# Allegro board PROIECT-PCB.brd
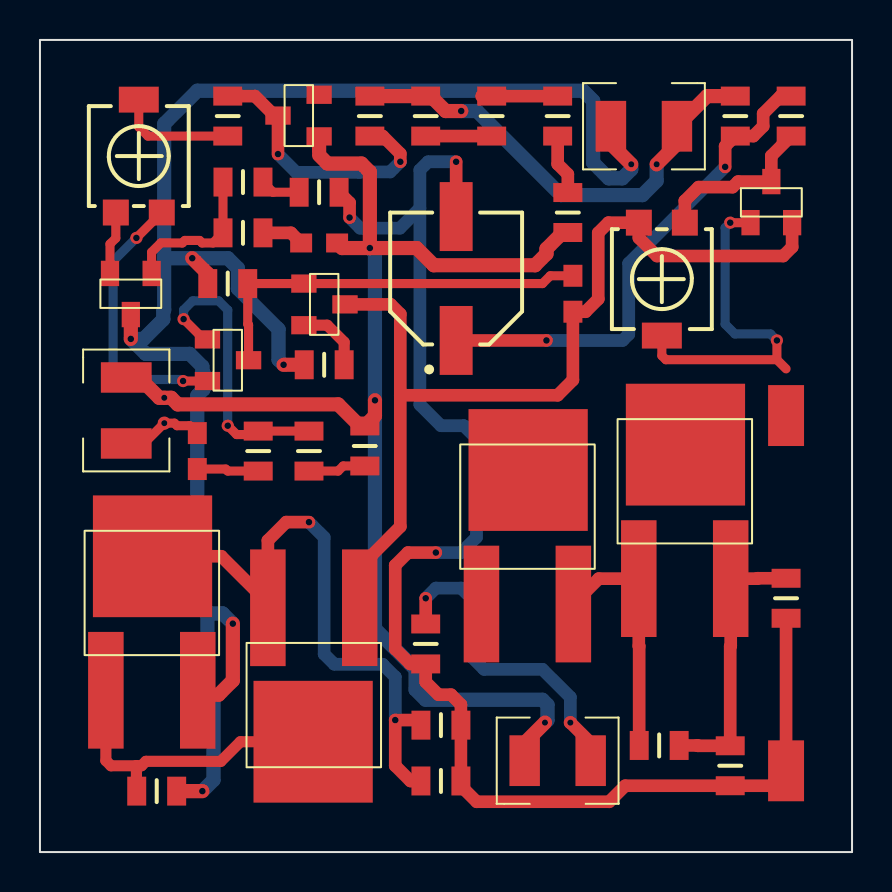
[diagram p0: board, top side]
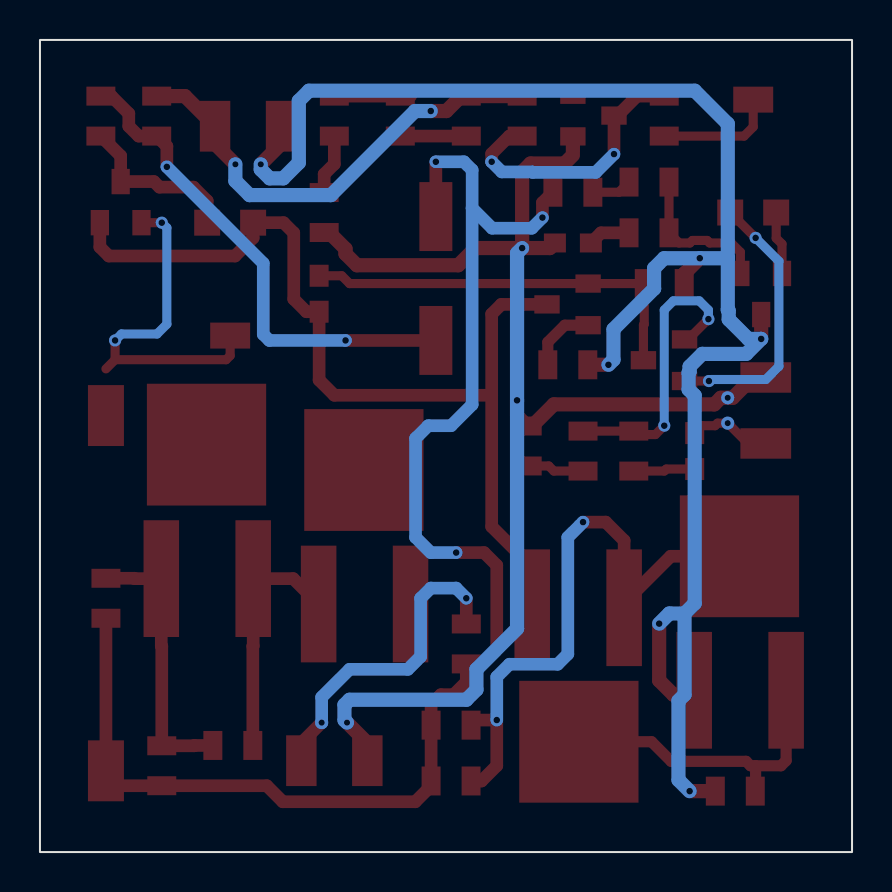
[diagram p1: board, bottom side, seen from below]

Outline 40.64 x 40.64 mm; copper layers: TOP, BOTTOM. Coordinates in mm from the lower left corner of the outline.
Outline path: rectangle 0,0 40.64,40.64

## Design rules (mm)
nets with their own width: min track width 0.457; nets N17839 N18413 N18419 N18433 N18443 N18567 N18575 N18713 N20372 N20376 SIGNAL-IN
nets with their own width: min track width 0.559; nets N18985 N19025
nets with their own width: min track width 0.635; nets N17849 N17953 N18017 N18083 N18151 N18611 N18637 N18835 N24736 N25913 N26075 N26146 SIGNAL-OUT
nets with their own width: min track width 0.711; nets +27V -27V GND

## Placement (name value [footprint] x y rotation side)
C1  4.7u  [CAPC2008X126N_0805]  7.87 20.07 270 top
C2  4.7u  [CAPC2008X126N_0805]  13.97 30.48 0 top
C3  10u  [CAPAE660X770N]  20.83 28.7 90 top
C4  4.7p  [CAPC2008X126N_0805]  26.67 27.94 270 top
D1  BZX84-C10  [TO236AB]  13.97 35.81 0 top
D2  LED  [RES2012X50N_0805]  26.42 32 270 top
J1  CON2  [1210RF_WV_12D]  4.32 22.1 90 top
J2  CON2  [1210RF_WV_12D]  30.23 36.32 0 top
J3  CON2  [1210RF_WV_12D]  25.91 4.57 180 top
J4  CON1  [SMD_PAD_3-05_1-80]  37.34 21.84 90 top
J5  CON1  [SMD_PAD_3-05_1-80]  37.34 4.06 270 top
Q1  QBC856B  [TO236AB]  8.38 25.65 180 top
Q2  QBC856B  [TO236AB]  5.59 28.96 90 top
Q3  QBC817-25  [TO236AB]  13.21 28.45 180 top
Q4  QBC846B  [TO236AB]  35.56 31.5 270 top
Q5  QMJD31C  [TO252AA]  22.1 12.45 0 top
Q6  QMJD32CT4G  [TO252AA]  16 12.19 180 top
Q7  QMJD31C  [TO252AA]  29.97 13.72 0 top
Q8  QMJD31C  [TO252AA]  3.3 8.13 0 top
R1  4.7  [RES2012X50N_0805]  10.92 20.07 90 top
R7  3.3k  [RES2012X50N_0805]  16.51 36.83 90 top
R8  15k  [RES2012X50N_0805]  9.4 36.83 90 top
R9  500  [TS53YL]  6.1 32 270 top
R10  3.3k  [RES2012X50N_0805]  10.16 30.99 0 top
R11  5.6k  [RES2012X50N_0805]  9.4 28.45 180 top
R12  330  [RES2012X50N_0805]  34.8 36.83 270 top
R13  3.3k  [RES2012X50N_0805]  37.59 36.83 270 top
R14  5k  [TS53YL]  29.97 31.5 90 top
R15  33  [RES2012X50N_0805]  14.22 24.38 180 top
R26  0.47  [RES2012X50N_0805]  30.99 5.33 0 top
R27  0.47  [RES2012X50N_0805]  5.84 3.05 0 top
R30  4.7  [RES2012X50N_0805]  19.3 10.41 90 top
R31  8.2k  [RES2012X50N_0805]  10.16 33.53 0 top
R32  22k  [RES2012X50N_0805]  13.97 33.02 0 top
R61  8.2k  [RES2012X50N_0805]  13.46 20.07 270 top
R62  22k  [RES2012X50N_0805]  16.26 20.32 90 top
R71  1k  [RES2012X50N_0805]  19.3 36.83 90 top
R72  220  [RES2012X50N_0805]  22.61 36.83 90 top
R73  33  [RES2012X50N_0805]  25.91 36.83 270 top
R281  1  [RES2012X50N_0805]  34.54 4.32 270 top
R282  0.47  [RES2012X50N_0805]  37.34 12.7 270 top
R291  1  [RES2012X50N_0805]  20.07 3.56 180 top
R292  0.47  [RES2012X50N_0805]  20.07 6.35 180 top

## Library data of the parts
C1 C2 C4 = CAP
C3 = CAPACITOR POL/SM_0
D1 = TCR22-2/TO_0
D2 = LED
J1-J3 = CON2
J4 J5 = CON1
Q1 = PNP BCE_0
Q2 = PNP BCE_1
Q3 = NPN BCE_0
Q4 = NPN BCE_1
Q5 Q7 Q8 = NPN BCE
Q6 = PNP BCE
R1 R7 R8 R10-R13 R15 R26 R27 R30-R32 R61 R62 R281 R282 R291 R292 = R
R9 R14 = POT
R71-R73 = RESISTOR

## Footprints (pads in the part's own frame, mm; a bottom-side part is the same pattern mirrored in y, then rotated)
1210RF_WV_12D
  rect 1.524x2.54 smd: 1(-1.651,0) 2(1.651,0)
CAPAE660X770N
  rect 3.45x1.65 smd: 1(-3.1,0) 2(3.1,0)
CAPC2008X126N_0805
  rect 1.1x0.95 smd: 1(-0.9,0) 2(0.9,0)
RES2012X50N_0805
  rect 0.95x1.45 smd: 1(-1,0) 2(1,0)
SMD_PAD_3-05_1-80
  rect 3.05x1.8 smd: 1(0,0)
TO236AB
  rect 1.27x0.914 smd: 1(0,0) 2(0,2.083) 3(-2.057,1.041)
TO252AA
  rect 1.778x5.842 smd: 1(-0.004,-0.034) 3(4.596,-0.034)
  rect 5.969x6.096 smd: 2(2.332,6.673)
TS53YL
  rect 1.3x1.3 smd: 1(0,0) 3(0,-2.3)
  rect 1.3x2 smd: 2(-5.65,-1.15)

## Nets
+27V: J2.2 Q5.2 Q7.2 R7.2 R12.1 R71.2
-27V: J2.1 Q2.3 Q8.3(E) R11.2 R15.2 R27.2
GND: C2.2 D1.1 D2.2(CATHODE) J1.2 J3.2 R62.2
SIGNAL-IN: C1.1 J1.1
SIGNAL-OUT: J3.1 R30.2
N17839: R8.1 R9.2(WIPER)
N17849: D1.3 R7.1 R8.2
N17953: Q4.3 Q5.1 R13.2 R14.3
N18017: Q5.3(E) Q7.1 R26.1
N18083: C3.1 R12.2 R13.1
N18151: Q7.3(E) R26.2 R281.1 R282.1
N18413: C1.2 R1.1
N18419: Q1.1 R1.2 R61.1
N18433: Q2.1 R10.1 R31.1
N18443: R31.2 R32.1
N18567: C4.1 Q1.3 Q3.1 R11.1
N18575: J4.1 Q4.1 R14.2(WIPER)
N18611: C4.2 Q3.3 Q4.2(E) Q6.1 R14.1
N18637: C3.2(CATHODE) J5.1 R30.1 R32.2 R281.2 R282.2 R291.1 R292.1
N18713: R61.2 R62.1
N18835: Q6.3(E) Q8.2 R291.2 R292.2
N18985: Q6.2 Q8.1 R27.1
N19025: Q3.2(E) R15.1
N20372: Q2.2(E) R9.3
N20376: Q1.2(E) R9.1
N24736: C2.1 R10.2
N25913: R72.2 R73.1
N26075: D2.1 R73.2
N26146: R71.1 R72.1

Pads without a net: D1 2

## Via types
v1: diameter 0.61, hole 0.33, TOP to BOTTOM, 24 vias
v2: diameter 0.66, hole 0.305, TOP to BOTTOM, 6 vias

## Routing (per net, layer and track width the routed paths; a pad name or vN(x,y) marks a point on that pad's centre or on a via; arc(x,y) is an arc through that point)
+27V: length 23.4
  TOP w0.711: v2(30.86,34.42) 31.88,35.43 J2.2 33.38,37.83 R12.1 ; R7.2 R71.2 19.55,37.83 20.3,37.08 v1(21.08,37.08)
  BOTTOM w0.711: v2(30.86,34.42) 30.86,33.59 30.15,32.88 26.08,32.88 21.87,37.08 v1(21.08,37.08)
-27V: length 89.6
  TOP w0.711: Q2.3 v1(4.55,25.68) ; v2(29.59,34.42) 28.57,35.43 J2.1 ; 8.38,28.43 R11.2 8.4,28.94 v1(7.62,29.72) ; R27.2 v1(8.13,3.05) ; v1(9.65,11.43) 9.65,8.59 8.94,7.87 7.93,7.87 7.9,7.84 ; v1(12.19,24.38) R15.2
  BOTTOM w0.711: 6.22,29.72 6.22,27.14 6.17,27.09 6.17,26.66 5.19,25.68 v1(4.55,25.68) 5.3,24.93 7.49,24.93 8.13,24.3 8.13,24.04 8.18,23.99 8.18,23.15 7.87,22.85 7.87,12.45 8.38,11.94 ; 6.22,29.72 6.22,36.44 7.87,38.1 27.18,38.1 27.69,37.59 27.69,34.49 28.46,33.72 29.14,33.72 29.59,34.16 v2(29.59,34.42) ; 6.22,29.72 v1(7.62,29.72) 9.4,29.72 9.91,29.21 9.91,28.19 11.94,26.16 11.94,24.64 v1(12.19,24.38) ; v1(9.65,11.43) 9.14,11.94 8.38,11.94 ; v1(8.13,3.05) 8.69,3.61 8.69,7.57 8.38,7.87 8.38,11.94
GND: length 68
  TOP w0.711: J1.2 4.95,23.75 5.97,22.73 v2(6.22,22.73) 6.56,22.73 6.89,22.4 14.92,22.4 16.01,21.32 R62.2 16.76,21.83 v1(16.76,22.61) ; C2.2 15.12,30.23 v1(16.51,30.23) ; J3.2 24.26,5.46 v2(25.27,6.48) ; D1.1 13.97,35.05 ; D2.2 26.17,31 25.35,30.19 25.35,29.94 24.78,29.37 19.71,29.37 18.85,30.23 v1(16.51,30.23) ; v1(16.51,30.23) 16.51,34.04 16.09,34.46 14.39,34.46 13.97,34.87
  BOTTOM w0.711: v2(25.27,6.48) 25.4,6.6 25.4,7.37 25.15,7.62 19.3,7.62 18.8,8.13 18.8,9.14 16.76,11.18 v1(16.76,22.61) 16.76,29.97 v1(16.51,30.23)
SIGNAL-IN: length 4.2
  TOP w0.457: C1.1 7.5,21.34 6.86,21.34 6.73,21.46 v2(6.22,21.46) 5.21,20.45 J1.1
SIGNAL-OUT: length 16.3
  TOP w0.635: v2(26.54,6.48) 27.56,5.46 J3.1 ; R30.2 v1(19.3,12.7)
  BOTTOM w0.635: v2(26.54,6.48) 26.54,7.75 25.15,9.14 22.23,9.14 21.59,9.78 21.59,12.7 21.08,13.21 19.81,13.21 v1(19.3,12.7)
N17839: length 6
  TOP w0.457: R9.2 4.95,36.29 5.4,35.83 R8.1
N17849: length 13.9
  TOP w0.635: v1(18.03,34.54) 18.03,34.95 17.15,35.83 R7.1 ; R8.2 10.76,37.83 11.73,36.86 D1.3 v1(11.91,34.93)
  BOTTOM w0.635: v1(11.91,34.93) 12.83,34.01 15.98,34.01 16,34.04 17.53,34.04 v1(18.03,34.54)
N17953: length 8.5
  TOP w0.635: R13.2 36.6,34.84 Q4.3 34.94,33.55 34.66,33.27 32.96,33.27 32.27,32.59 R14.3
N18017: length 12.2
  TOP w0.635: Q5.3 27.96,13.68 Q7.1 29.97,10.32 29.99,10.3 R26.1
N18083: length 24.9
  TOP w0.635: v1(34.29,34.29) 34.29,35.32 R12.2 35.7,35.83 36.19,36.32 36.19,36.96 37.07,37.83 R13.1 ; C3.1 v1(25.35,25.6)
  BOTTOM w0.635: v1(34.29,34.29) 29.46,29.46 29.46,25.91 29.16,25.6 v1(25.35,25.6)
N18151: length 13.7
  TOP w0.635: R26.2 32.91,5.33 32.92,5.32 R281.1 34.54,10.29 34.57,10.32 Q7.3 35.9,13.68 35.92,13.7 R282.1
N18413: length 3.1
  TOP w0.457: C1.2 9.3,19.17 9.4,19.07 R1.1
N18419: length 14.8
  TOP w0.457: v1(7.19,26.67) 8.2,25.65 Q1.1 ; v1(9.4,21.34) 9.84,20.89 10.75,20.89 R1.2 R61.1
  BOTTOM w0.457: v1(9.4,21.34) 9.4,27.13 8.94,27.58 7.65,27.58 7.19,27.13 v1(7.19,26.67)
N18433: length 7.7
  TOP w0.457: R31.1 R10.1 8.65,30.48 8.12,30.48 7.99,30.61 7.25,30.61 7.12,30.48 6.05,30.48 5.59,30.02 Q2.1
N18443: length 2
  TOP w0.457: R31.2 11.67,33.02 R32.1
N18567: length 20.3
  TOP w0.457: C4.1 25.54,28.84 25.15,28.45 Q3.1 R11.1 10.4,26.42 10.44,26.37 Q1.3
N18575: length 17.6
  TOP w0.457: 36.88,24.64 v1(36.88,25.6) ; 36.88,24.64 37.34,24.18 ; 36.88,24.64 31.32,24.64 31.12,24.84 R14.2 ; v1(34.54,31.5) Q4.1
  BOTTOM w0.457: v1(36.88,25.6) 36.56,25.93 34.78,25.93 34.29,26.42 34.29,31.24 v1(34.54,31.5)
N18611: length 48.2
  TOP w0.635: 18.03,22.86 18.03,26.92 17.55,27.41 Q3.3 ; 18.03,22.86 25.91,22.86 26.67,23.62 C4.2 27.3,27.04 27.94,27.68 27.94,30.99 28.45,31.5 R14.1 29.97,30.73 30.88,29.83 37.19,29.83 37.64,30.28 Q4.2 ; 18.03,22.86 18.03,16.29 16.01,14.26 Q6.1
N18637: length 73.3
  TOP w0.635: C3.2 v1(20.83,34.54) ; R282.2 J5.1 36.59,3.32 R281.2 29.29,3.32 28.49,2.52 21.86,2.52 21.07,3.31 R291.1 R292.1 21.07,7.38 20.57,7.87 19.94,7.87 19.3,8.51 R30.1 18.53,9.41 17.78,10.16 17.78,14.35 18.41,14.99 v1(19.81,14.99) ; R32.2 15.49,32.5 v1(15.49,31.75)
  BOTTOM w0.635: v1(20.83,34.54) 19.42,34.54 19.01,34.13 19.01,32.22 ; v1(15.49,31.75) 16.02,31.22 18.01,31.22 19.01,32.22 ; v1(19.81,14.99) 21.08,14.99 21.84,15.75 21.84,20.7 21.21,21.34 20.07,21.34 19.01,22.39 19.01,32.22
N18713: length 2.9
  TOP w0.457: R62.1 15.18,19.32 14.92,19.07 R61.2
N18835: length 30.9
  TOP w0.635: R292.2 18.81,6.6 v1(17.78,6.6) 17.78,4.32 18.54,3.56 R291.2 ; Q6.3 11.41,12.47 ; 11.41,12.47 9.08,14.8 Q8.2 ; 11.41,12.47 11.41,15.59 12.32,16.51 v1(13.46,16.51)
  BOTTOM w0.635: v1(13.46,16.51) 14.22,15.75 14.22,9.91 14.73,9.4 17.14,9.4 17.78,8.76 v1(17.78,6.6)
N18985: length 15.8
  TOP w0.559: R27.1 4.83,3.06 4.83,4.32 ; Q8.1 3.3,4.58 3.56,4.32 4.83,4.32 ; Q6.2 10.03,5.52 9.05,4.54 5.3,4.54 5.08,4.32 4.83,4.32
N19025: length 3.5
  TOP w0.559: Q3.2 14.37,26.37 15.22,25.52 R15.1
N20372: length 3.2
  TOP w0.457: R9.3 3.8,30.72 3.51,30.43 Q2.2
N20376: length 13.7
  TOP w0.457: R9.1 v1(4.83,30.73) ; Q1.2 v1(7.16,23.57)
  BOTTOM w0.457: v1(7.16,23.57) 7.09,23.65 4.32,23.65 3.66,24.31 3.66,29.57 v1(4.83,30.73)
N24736: length 2.1
  TOP w0.635: R10.2 12.56,30.99 C2.1
N25913: length 3.8
  TOP w0.635: 22.1,37.83 R72.2 R73.1
N26075: length 3
  TOP w0.635: D2.1 26.42,33.92 25.91,34.43 R73.2
N26146: length 3.3
  TOP w0.635: R71.1 R72.1
